# Altium PCB PCB1.PcbDoc
Units mm, origin at the board's own origin, x right, y up, seen from the top; angles counter-clockwise.
Board outline 90.8 x 90.17 mm, 2 copper layers (Top Layer, Bottom Layer); 24 components, 34 nets, 99 pads, 11 vias.
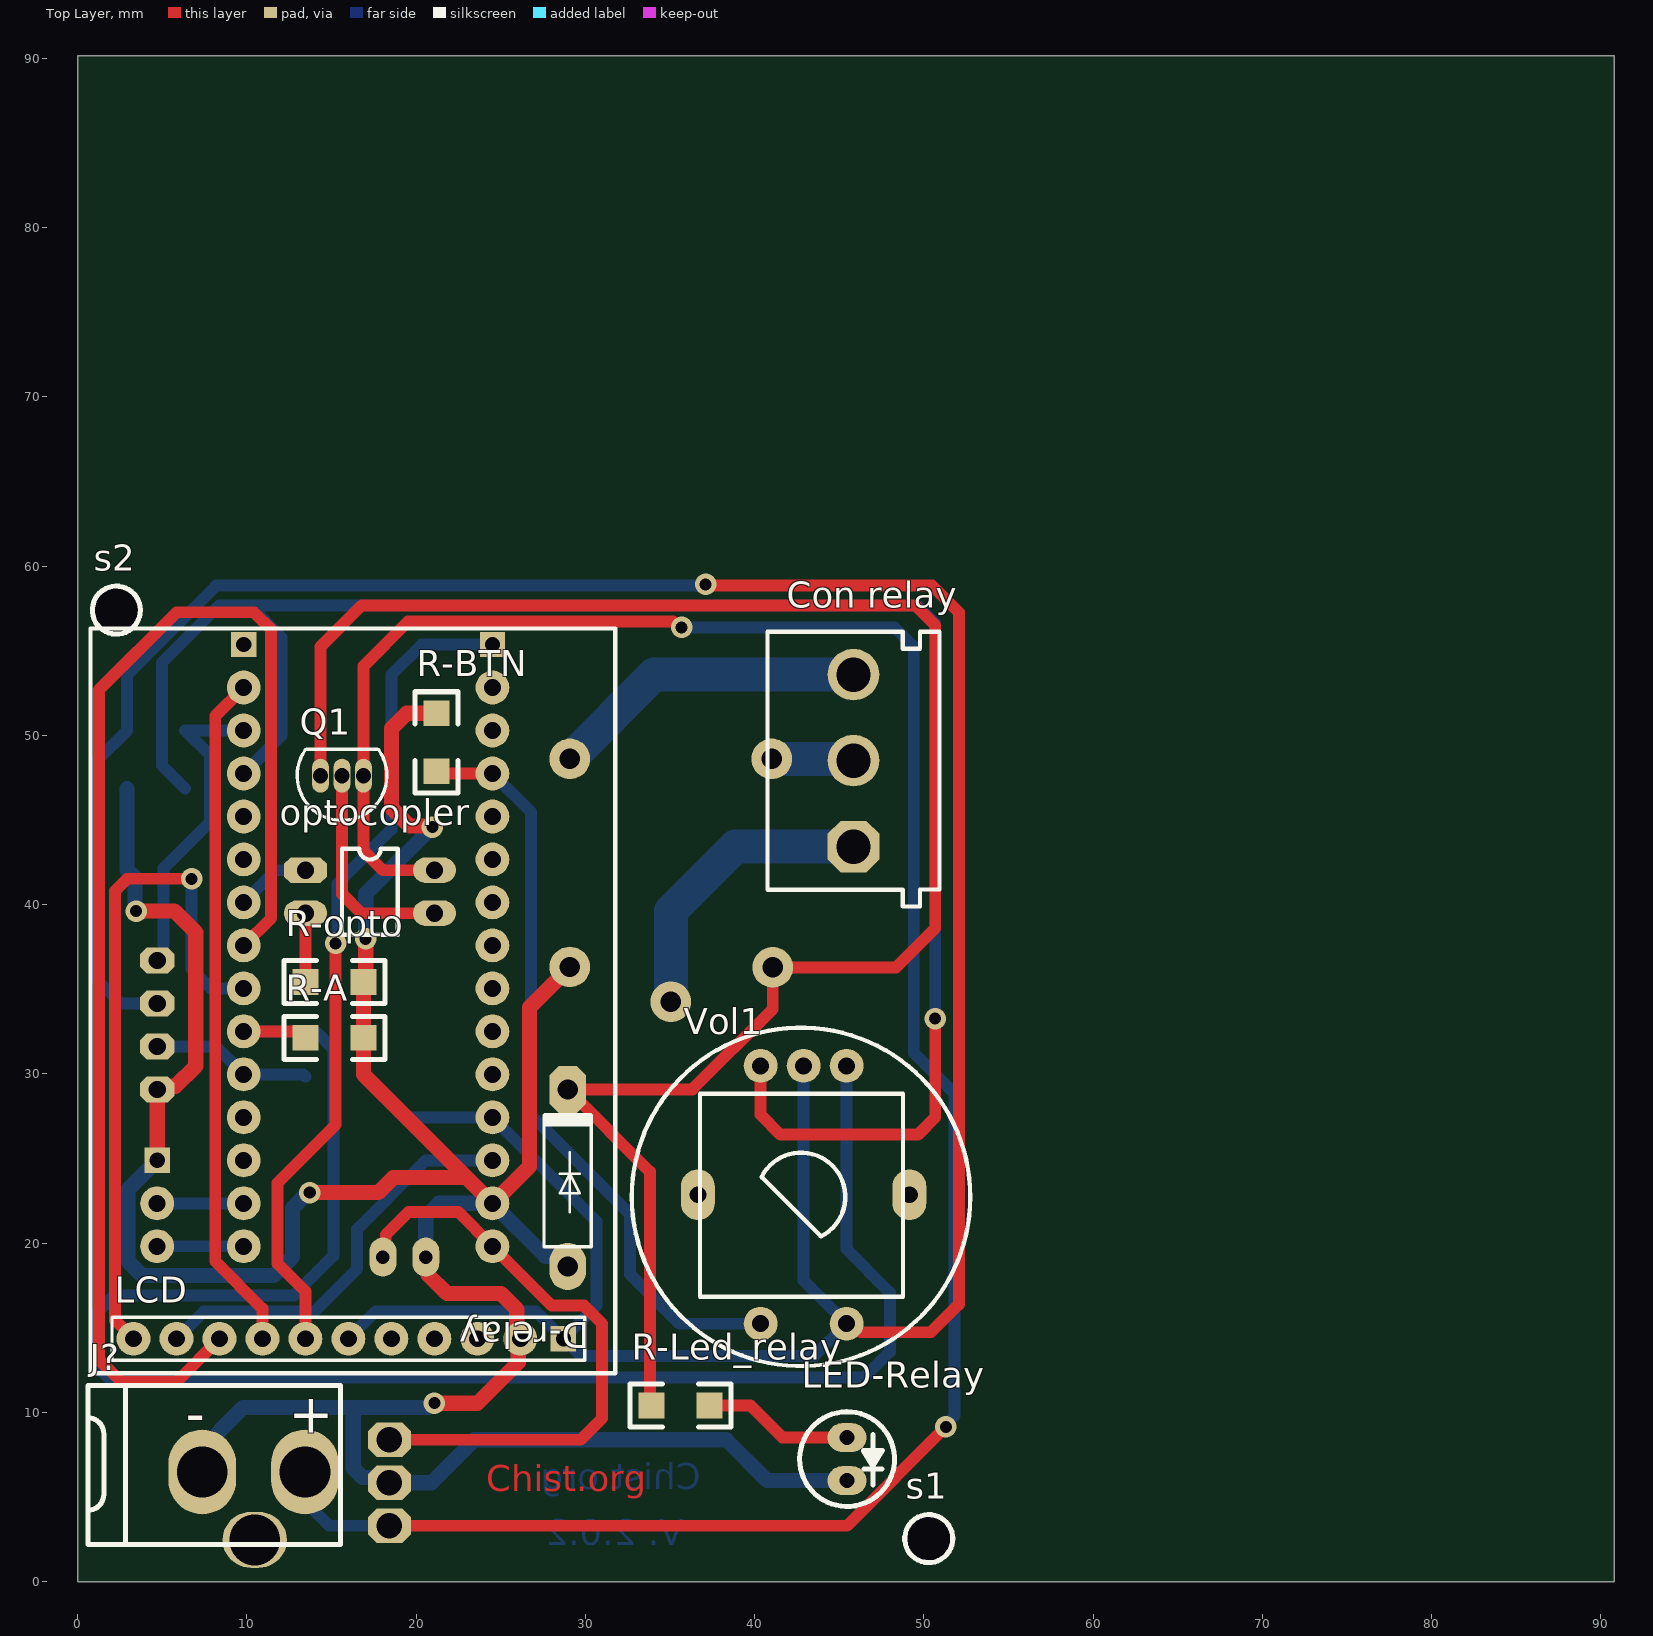
[diagram p0: Top Layer view]
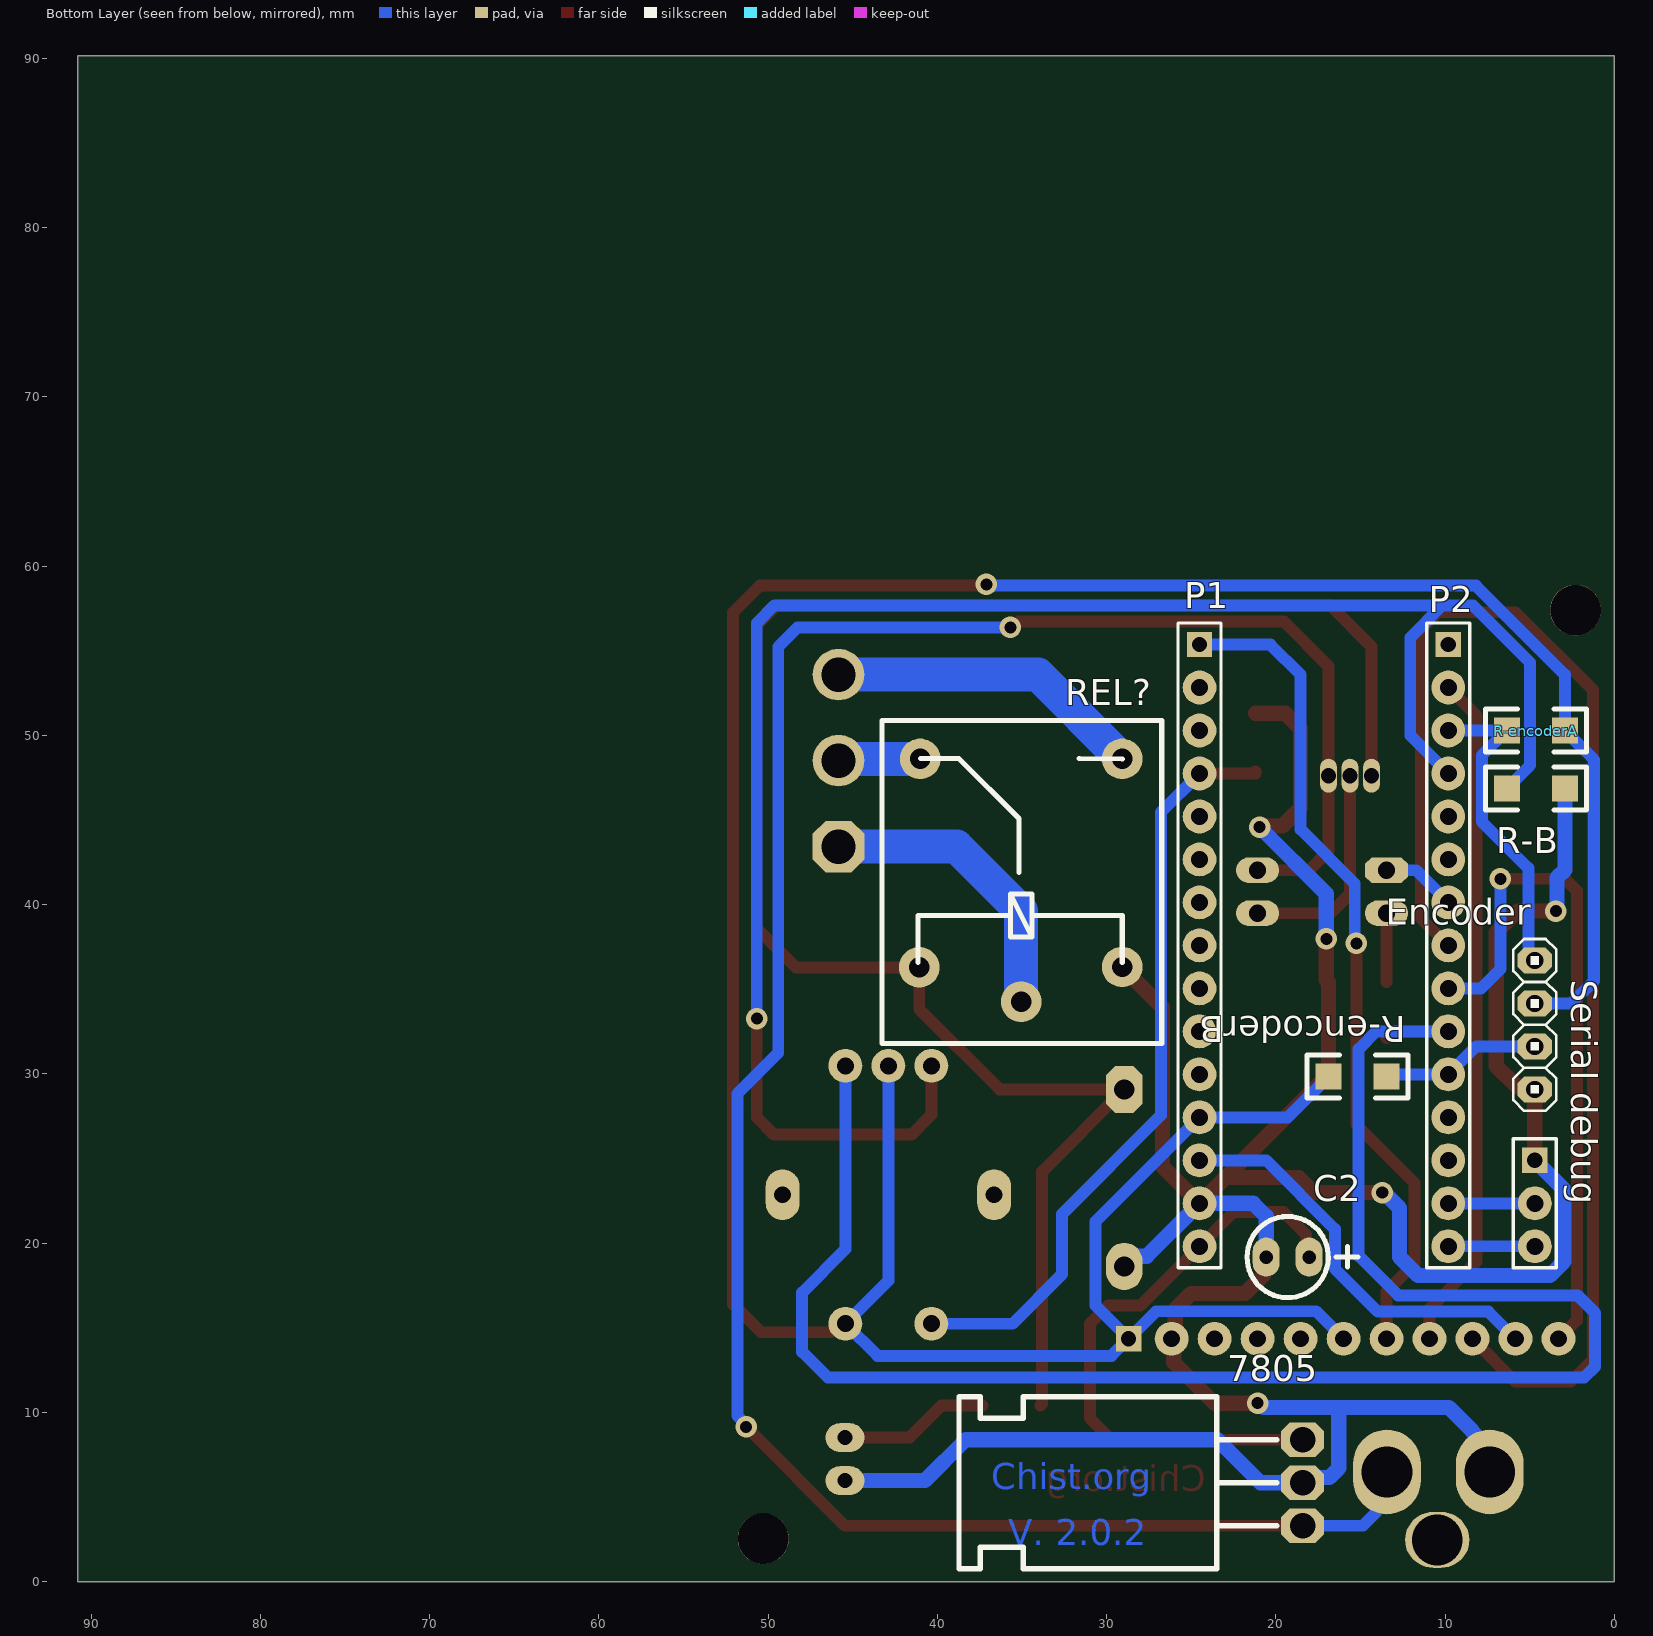
[diagram p1: Bottom Layer view, seen from below]

## Layer stack, top to bottom
Top Solder: solder mask 0.0102, Solder Resist, Dk 3.5
Top Layer: signal copper 0.0356
Dielectric 1: dielectric 0.32, FR-4, Dk 4.8
Bottom Layer: signal copper 0.0356
Bottom Solder: solder mask 0.0102, Solder Resist, Dk 3.5

## Board outline
0,0 90.805,0 90.805,90.17 0,90.17

## Design rules (kind name [scope] priority, off if disabled: settings)
Clearance [All] p1: gap=0.254 ignorepadtopadclearanceinfootprint=FALSE except(0: Arc-Hole Track-Hole SMDPad-Hole THPad-Hole Via-Hole Fill-Hole Poly-Hole Region-Hole Text-Hole)
PolygonConnect [All] p1: connectstyle=Relief reliefconductorwidth=0.254 reliefentries=4 polygonreliefangle="90 Angle" airgapwidth=0.254
RoutingVias [All] p1: holewidth=0.711 width=1.27 viastyle="Through Hole" minholewidth=0.711 minwidth=1.27 maxholewidth=0.711 maxwidth=1.27
SolderMaskExpansion [All] p1: expansion=0.102 istentingtop=FALSE
Width [InNet('N/C')] p1: maxlimit=2 minlimit=2 preferedwidth=2 minimp=50.000000 maximp=50.000000 favimp=50.000000
Width Width_4 [InNet('N/O')] p2: maxlimit=2 minlimit=2 preferedwidth=2 minimp=50.000000 maximp=50.000000 favimp=50.000000
Width Width_3 [InNet('COM')] p3: maxlimit=2 minlimit=2 preferedwidth=2 minimp=50.000000 maximp=50.000000 favimp=50.000000
Width Width_2 [InNet('GND')] p4: maxlimit=1.1 minlimit=0.7 preferedwidth=0.9 minimp=50.000000 maximp=50.000000 favimp=50.000000
Width Width_1 [All] p5: maxlimit=0.7 minlimit=0.7 preferedwidth=0.7 minimp=50.000000 maximp=50.000000 favimp=50.000000
30 further rules are at their usual default settings.

## Components (designator, comment, footprint, x,y, rotation, side; value= is the part's Value field where it differs from the comment)
7805 "7805" My_TO-220 18.428,3.315 r90 bottom
C2 "CAP_POL" RB.1/.3 18.034,19.177 r180 bottom
"Con relay" "CON3 pin Green" My_CN3 40.754,40.907 r90 top
D-relay "1N4007" My_DO-41 28.702,29.309 r270 top
Encoder "Header 4" My_1X04 4.699,32.893 r90 bottom
J? "POWER-JACK" POWER-JACK 13.436,6.477 r0 top
LCD "Header 11" HDR1X11 28.702,14.351 r180 top
LED-Relay "LED" LED_5MM 45.466,8.509 r90 top
optocopler "Optoisolator" My_opto 13.475,42.05 r0 top
P1 "Header 15" HDR1X15 24.511,55.372 r270 bottom
P2 "Header 15" HDR1X15 9.811,55.372 r270 bottom
Q1 "BC547" TO92 15.621,47.625 r90 top
R-A "1K" 1206 13.462,32.131 r0 top
R-B "1K" 1206 6.35,46.863 r180 bottom
R-BTN "1K" 1206 21.209,47.879 r90 top
R-encoderA "1K" 1206 2.921,50.292 r0 bottom
R-encoderB "1K" 1206 16.891,29.845 r180 bottom
R-Led_relay "RES" 1206 37.338,10.414 r180 top
R-opto "1K" 1206 13.462,35.433 r0 top
REL? "RELAY-M" RELAY3 29.083,36.322 r0 bottom
s1 "SIP1" SIP1 50.292,2.54 r0 top
s2 "SIP1" SIP1 2.286,57.404 r0 top
"Serial debug" "Header 3" HDR1X3 4.699,24.892 r270 bottom
Vol1 "Volume" "rotary Encoder Pot" 42.872,22.86 r180 top

## Footprints (in the part's own frame and the unit in brackets; to place one, negate y for a bottom-side part, rotate by r counter-clockwise, add the part's x,y. Pads: shape width x height; smd on the part's side, far side on the other; paste and mask are expansions set on the pad)
1206 [mil]
  rect 60x60 smd: 1(0,0) 2(135,0)
  silkscreen extent -50,-50 185,50
HDR1X3 [mm] "Connector; Header; 3 Position"
  rect 1.5x1.5 hole 0.9: 1(0,0)
  round 2 hole 1: 2(2.54,0) 3(5.08,0)
  silkscreen extent -1.27,-1.27 6.35,1.27
HDR1X11 [mm] "Connector; Header; 11 Position"
  rect 1.5x1.5 hole 0.9: 1(0,0)
  round 2 hole 1: 2(2.54,0) 3(5.08,0) 4(7.62,0) 5(10.16,0) 6(12.7,0) 7(15.24,0) 8(17.78,0) 9(20.32,0) 10(22.86,0) 11(25.4,0)
  silkscreen extent -1.27,-1.27 26.67,1.27
HDR1X15 [mm] "Connector; Header; 15 Position"
  rect 1.5x1.5 hole 0.9: 1(0,0)
  round 2 hole 1: 2(2.54,0) 3(5.08,0) 4(7.62,0) 5(10.16,0) 6(12.7,0) 7(15.24,0) 8(17.78,0) 9(20.32,0) 10(22.86,0) 11(25.4,0) 12(27.94,0) 13(30.48,0) 14(33.02,0) 15(35.56,0)
  silkscreen extent -1.27,-1.27 36.83,1.27
LED_5MM [mm]
  oval 1.7x2.3 hole 0.9: 1(0,0) 2(-2.54,0)
  silkscreen extent -4.07,-2.8 1.53,2.8
My_1X04 [mil]
  oct 60x80 hole 40: 1(-150,0) 2(-50,0) 3(50,0) 4(150,0)
  silkscreen extent -200,-50 200,50
My_CN3 [mil]
  oct 120x120 hole 80: 1(99.5,-200.5)
  round 120 hole 80: 2(299.5,-200.5) 3(499.5,-200.5)
  silkscreen extent -40,-401 600,-1
My_DO-41 [mil]
  oval 110x85 hole 47.24: A(420.71,10)
  oct 110x85 hole 47.24: K(8.9,10)
  silkscreen extent 64,-45 375,65
My_opto [mil]
  oct 100x60 hole 40: 1(-0.5,-0.5)
  oval 100x60 hole 40: 2(-0.5,-100.5) 3(299.5,-0.5) 4(299.5,-100.5)
  silkscreen extent 84,-150 214,50
My_TO-220 [mil]
  oct 0x0 all layers, no hole: 0(99.49,699.49)
  oct 80x100 hole 60: 1(-0.5,-0.5) 2(99.5,-0.5) 3(199.5,-0.5)
  silkscreen extent -100,60 300,800
POWER-JACK [mm]
  oval 4x5 hole 3: 1(0,0) 2(-6.07,0)
  oval 3.8x3.3 hole 3: ""(-2.972,-4.014)
  silkscreen extent -12.83,-4.29 2.11,5.1
RB.1/.3 [mm]
  oval 1.6x2.3 hole 0.8: 1(0,0) 2(-2.54,0)
  silkscreen extent -3.67,-2.4 2.87,2.4
RELAY3 [mm]
  round 2.4 hole 1.2: 1(0,0) 2(11.989,0.025) 3(5.969,2.057) 4(11.938,-12.294) 5(0,-12.294)
  silkscreen extent -2.34,-14.55 14.2,4.52
"rotary Encoder Pot" [mm] "KY-040 encoder with switch"
  round 2 hole 1: 1(-2.567,-7.62) 2(-0.027,-7.62) 3(2.513,-7.62) 4(-2.567,7.62) 5(2.513,7.62)
  oval 2x3 hole 1: 6(-6.277,0) 7(6.223,0)
  silkscreen extent -5.9,-5.97 6.1,6.03
SIP1 [mm]
  round 3 hole 3: 1(0,0)
  silkscreen extent -1.42,-1.42 1.42,1.42
TO92 [mm] "TO, Flat Index; 3 In-Line, Axial Leads; Body Dia. 4.8mm; Leads 0.51 x 0.51 mm (max)"
  oval 2x1 hole 0.9: 1(0,-1.27) 2(0,0) 3(0,1.27)
  silkscreen extent -2.65,-2.65 1.55,2.65, body extent -2.29,-2.3 1.32,2.3, height 7

## Part data
7805: "Regulator"
"Con relay": "Connector green screw"
D-relay: "1 Amp Diode"
Encoder: "Header, 4-Pin", LatestRevisionDate=17-Jul-2002, LatestRevisionNote="Re-released for DXP Platform.", Publisher="Altium Limited"
LCD: "Header, 11-Pin", LatestRevisionDate=17-Jul-2002, LatestRevisionNote="Re-released for DXP Platform.", Publisher="Altium Limited"
P1 P2: "Header, 15-Pin", LatestRevisionDate=17-Jul-2002, LatestRevisionNote="Re-released for DXP Platform.", Publisher="Altium Limited"
R-A R-B R-BTN R-encoderA R-encoderB R-opto: library part RES
"Serial debug": "Header, 3-Pin", LatestRevisionDate=17-Jul-2002, LatestRevisionNote="Re-released for DXP Platform.", Publisher="Altium Limited"

## Via types
v1: diameter 1.27, hole 0.711, Top Layer to Bottom Layer, 11 vias

## Nets (pads, with @x,y where several pads share a name; then routed paths per layer and width w, separated by ;. In a path a pad name is that pad's centre, name@x,y a point inside that pad or via, vN(x,y) a via of type N, cw(c..) or ccw(c..) an arc to the next point about the centre after c; other vN are vias at no path point)
+5V: Encoder.3 LCD.1 LCD.6 P1.12 R-encoderA.1 R-encoderB.1 Vol1.2 Vol1.4 | length 196.6
  Top Layer w0.7: v1(37.109,58.922) 37.18,58.852 50.495,58.852 52.07,57.277 52.07,16.383 50.419,14.732 46.299,14.732 45.761,15.27 Vol1.4@45.469,15.27
  Bottom Layer w0.7: Encoder.3 2.54,34.163 1.194,35.509 1.194,48.565 R-encoderA.1 2.921,53.594 8.179,58.852 37.039,58.852 v1(37.109,58.922) ; LCD.6 17.628,15.977 27.076,15.977 LCD.1 ; R-encoderB.1 19.304,27.432 P1.12 30.658,21.285 30.658,16.307 LCD.1 ; Vol1.2 42.899,17.78 Vol1.4 43.534,13.335 29.718,13.335 LCD.1
+12V: 7805.1 J?.1 optocopler.3 Q1.1 | length 139.7
  Top Layer w0.7: 7805.1 45.466,3.302 v1(51.308,9.144) ; optocopler.3 18.034,42.037 16.891,43.18 Q1.1 16.891,54.102 19.515,56.726 35.195,56.726 35.533,56.388 v1(35.687,56.388)
  Bottom Layer w0.7: J?.1 14.067,5.846 14.067,4.094 14.859,3.302 7805.1 ; v1(35.687,56.388) 48.26,56.388 49.403,55.245 49.403,31.242 51.816,28.829 51.816,9.806 51.308,9.298 v1(51.308,9.144)
A0: P1.4 R-BTN.1 Vol1.5 | length 45.3
  Top Layer w0.7: R-BTN.1 21.209,47.752 P1.4
  Bottom Layer w0.7: P1.4 26.797,45.466 26.797,27.559 32.639,21.717 32.639,18.161 35.56,15.24 Vol1.5
A1: P1.5
A2: P1.6
A3: P1.7
A4: P1.8
A5: P1.9
A6: P1.10
A7: P1.11
COM: "Con relay.1" REL?.3 | length 17.7
  Bottom Layer w2: REL?.3 35.052,39.624 38.862,43.434 45.847,43.434
D0: "Serial debug.3" P2.15 | length 5.1
  Bottom Layer w0.7: 4.699,19.812 P2.15
D1: "Serial debug.2" P2.14 | length 5.1
  Bottom Layer w0.7: 4.699,22.352 P2.14
D2: Encoder.2 P2.11 R-encoderB.2 | length 9.5
  Bottom Layer w0.7: Encoder.2 8.16,31.623 P2.11 13.335,29.972 R-encoderB.2
D3: P2.10 R-A.1 Vol1.1 | length 106
  Top Layer w0.7: P2.10 13.081,32.512 R-A.1
  Bottom Layer w0.7: P2.10 14.072,32.512 15.113,31.471 15.113,19.242 12.78,16.909 2.177,16.909 1.143,15.875 1.143,12.7 1.778,12.065 46.484,12.065 47.997,13.578 47.997,17.078 45.439,19.636 Vol1.1
D4: LCD.11 P2.9 | length 40.6
  Top Layer w0.7: LCD.11 2.215,15.438 2.215,40.823 2.921,41.529 v1(6.731,41.529)
  Bottom Layer w0.7: v1(6.731,41.529) 6.731,36.195 7.874,35.052 P2.9
D5: LCD.9 P2.8 | length 80.1
  Top Layer w0.7: LCD.9 5.842,11.811 2.565,11.811 1.261,13.115 1.261,52.696 5.842,57.277 10.414,57.277 11.43,56.261 11.43,39.211 P2.8
D6: optocopler.1 P2.7 | length 4.4
  Bottom Layer w0.7: P2.7 11.716,42.037 optocopler.1
D7: P2.6
D8: P2.5
D9: P2.4 R-B.1 Vol1.3 | length 110.8
  Top Layer w0.7: Vol1.3 40.359,27.586 41.529,26.416 49.657,26.416 50.673,27.432 v1(50.673,33.274)
  Bottom Layer w0.7: R-B.1 4.978,48.235 4.978,54.302 8.36,57.683 10.16,57.683 ; P2.4 12.065,50.006 12.065,55.778 10.16,57.683 ; Vol1.3 Vol1.3@40.631,30.48 ; v1(50.673,33.274) 50.673,56.642 49.632,57.683 10.16,57.683
D10: Encoder.4 P2.3 R-encoderA.2 | length 19
  Bottom Layer w0.7: Encoder.4 5.08,37.084 5.08,42.164 7.823,44.907 7.823,48.819 R-encoderA.2 P2.3
D11: LCD.8 P2.2 | length 40.3
  Top Layer w0.7: P2.2 8.128,51.149 8.128,18.923 10.922,16.129 LCD.8
D12: P2.1
D13: LCD.7 P1.1 | length 49.4
  Top Layer w0.7: LCD.7 13.462,17.145 11.811,18.796 11.811,23.568 15.24,26.997 v1(15.24,37.719)
  Bottom Layer w0.7: v1(15.24,37.719) 15.336,37.815 15.336,41.244 18.542,44.45 18.542,53.594 20.32,55.372 P1.1
GND: 7805.2 "Serial debug.1" C2.2 D-relay.A Encoder.1 J?.2 LCD.2 LED-Relay.2 P1.14 R-A.2 R-B.2 R-BTN.2 R-opto.2 REL?.1 | length 192.9
  Top Layer w0.9: v1(3.454,39.624) 5.715,39.624 6.985,38.354 6.985,30.475 5.787,29.278 4.894,29.278 Encoder.1 4.699,24.892 ; v1(13.716,22.987) 17.767,22.987 18.656,23.876 22.987,23.876 ; v1(17.018,37.973) 17.018,35.56 R-opto.2 R-A.2 16.891,29.972 22.987,23.876 ; 7805.2@17.595,5.521 7805.2 ; C2.2 20.708,19.043 20.708,18.132 21.822,17.018 25.019,17.018 25.952,16.085 25.952,14.561 LCD.2 26.035,14.224 26.035,12.954 23.622,10.541 v1(21.082,10.541) ; v1(20.955,44.577) 20.884,44.648 19.614,44.648 18.542,45.72 18.542,50.419 19.431,51.308 R-BTN.2 ; REL?.1 26.695,33.934 26.695,24.536 P1.14 22.987,23.876
  Bottom Layer w0.9: R-B.2 2.921,42.059 3.384,41.596 3.384,39.695 v1(3.454,39.624) ; 4.699,24.892 2.972,23.165 2.972,18.923 3.81,18.085 11.608,18.085 12.7,19.177 12.7,22.071 13.616,22.987 v1(13.716,22.987) ; J?.2 7.366,7.816 8.386,8.836 8.386,8.894 9.779,10.287 16.224,10.287 ; v1(17.018,37.973) 17.018,40.64 v1(20.955,44.577) ; C2.2 20.574,21.59 21.336,22.352 P1.14 27.635,19.228 28.956,19.228 D-relay.A ; v1(21.082,10.541) 20.982,10.541 20.728,10.287 16.224,10.287 ; LED-Relay.2 40.742,5.969 38.329,8.382 23.444,8.382 20.904,5.842 7805.2 18.107,6.151 16.837,6.151 16.281,6.706 16.281,10.229 16.224,10.287
N/C: "Con relay.2" REL?.4 | length 4.9
  Bottom Layer w2: REL?.4 45.745,48.616 45.847,48.514
N/O: "Con relay.3" REL?.5 | length 18.8
  Bottom Layer w2: REL?.5 34.061,53.594 45.847,53.594
NetD-relay_K: D-relay.K Q1.3 R-Led_relay.2 REL?.2 | length 111.2
  Top Layer w0.7: Q1.3 14.351,55.245 16.786,57.68 49.508,57.68 50.673,56.515 50.673,38.608 48.362,36.297 REL?.2 41.072,33.833 36.322,29.083 D-relay.K 33.814,24.225 33.814,10.509 R-Led_relay.2
NetLED-Relay_1: LED-Relay.1 R-Led_relay.1 | length 8.9
  Top Layer w0.7: R-Led_relay.1 39.751,10.414 41.656,8.509 LED-Relay.1
Netoptocopler_2: optocopler.2 R-opto.1 | length 4.1
  Top Layer w0.7: R-opto.1 optocopler.2
Netoptocopler_4: optocopler.4 Q1.2 | length 12.9
  Top Layer w0.7: Q1.2 15.621,40.64 16.764,39.497 optocopler.4
Reset: LCD.10 P1.13 | length 24.4
  Bottom Layer w0.7: LCD.10 7.446,15.955 13.97,15.955 16.51,18.495 16.51,20.828 20.574,24.892 P1.13
VIN: 7805.3 C2.1 P1.15 | length 36.2
  Top Layer w0.7: C2.1 18.206,19.349 18.206,20.492 19.558,21.844 22.479,21.844 P1.15 28.016,16.307 29.921,16.307 30.988,15.24 30.988,9.652 29.718,8.382 7805.3
pads on no net: 7805.0 J?. LCD.3 LCD.4 LCD.5 P1.2 P1.3 P2.12 P2.13 s1.1 s2.1 Vol1.6 Vol1.7

## Other copper
Top Layer:
  text "Chist.org" at 24.13,5.334 h1.52
Bottom Layer:
  text "Chist.org" at 36.83,5.461 h1.52
  text "V. 2.0.2" at 35.814,2.159 h1.52

## Silkscreen, mask and mechanical layers (free items; w line width, h text height)
Top Overlay:
  circle w0.254: c42.745,22.733 r10
  lines w0.254: 0.762,12.319 31.762,12.319 31.762,56.319 0.762,56.319 0.762,12.319
Mechanical 1:
  lines w0.254: 0,0 0,59.817 52.832,59.817 52.832,0 0,0

## Text inside footprints (layer, text, board x,y; h text height)
J?: Top Overlay "-" at 6.375,8.788 h2.3; Top Overlay "+" at 12.471,8.788 h2.3